# Altium PCB AI-EYE.PcbDoc
Units mil, origin at the board's own origin, x right, y up, seen from the top; angles counter-clockwise.
Board outline 2170 x 1780 mil, 2 copper layers (Top Layer, Bottom Layer); 71 components, 68 nets, 256 pads, 122 vias.
Unrouted connection lines stored in the file: 48.
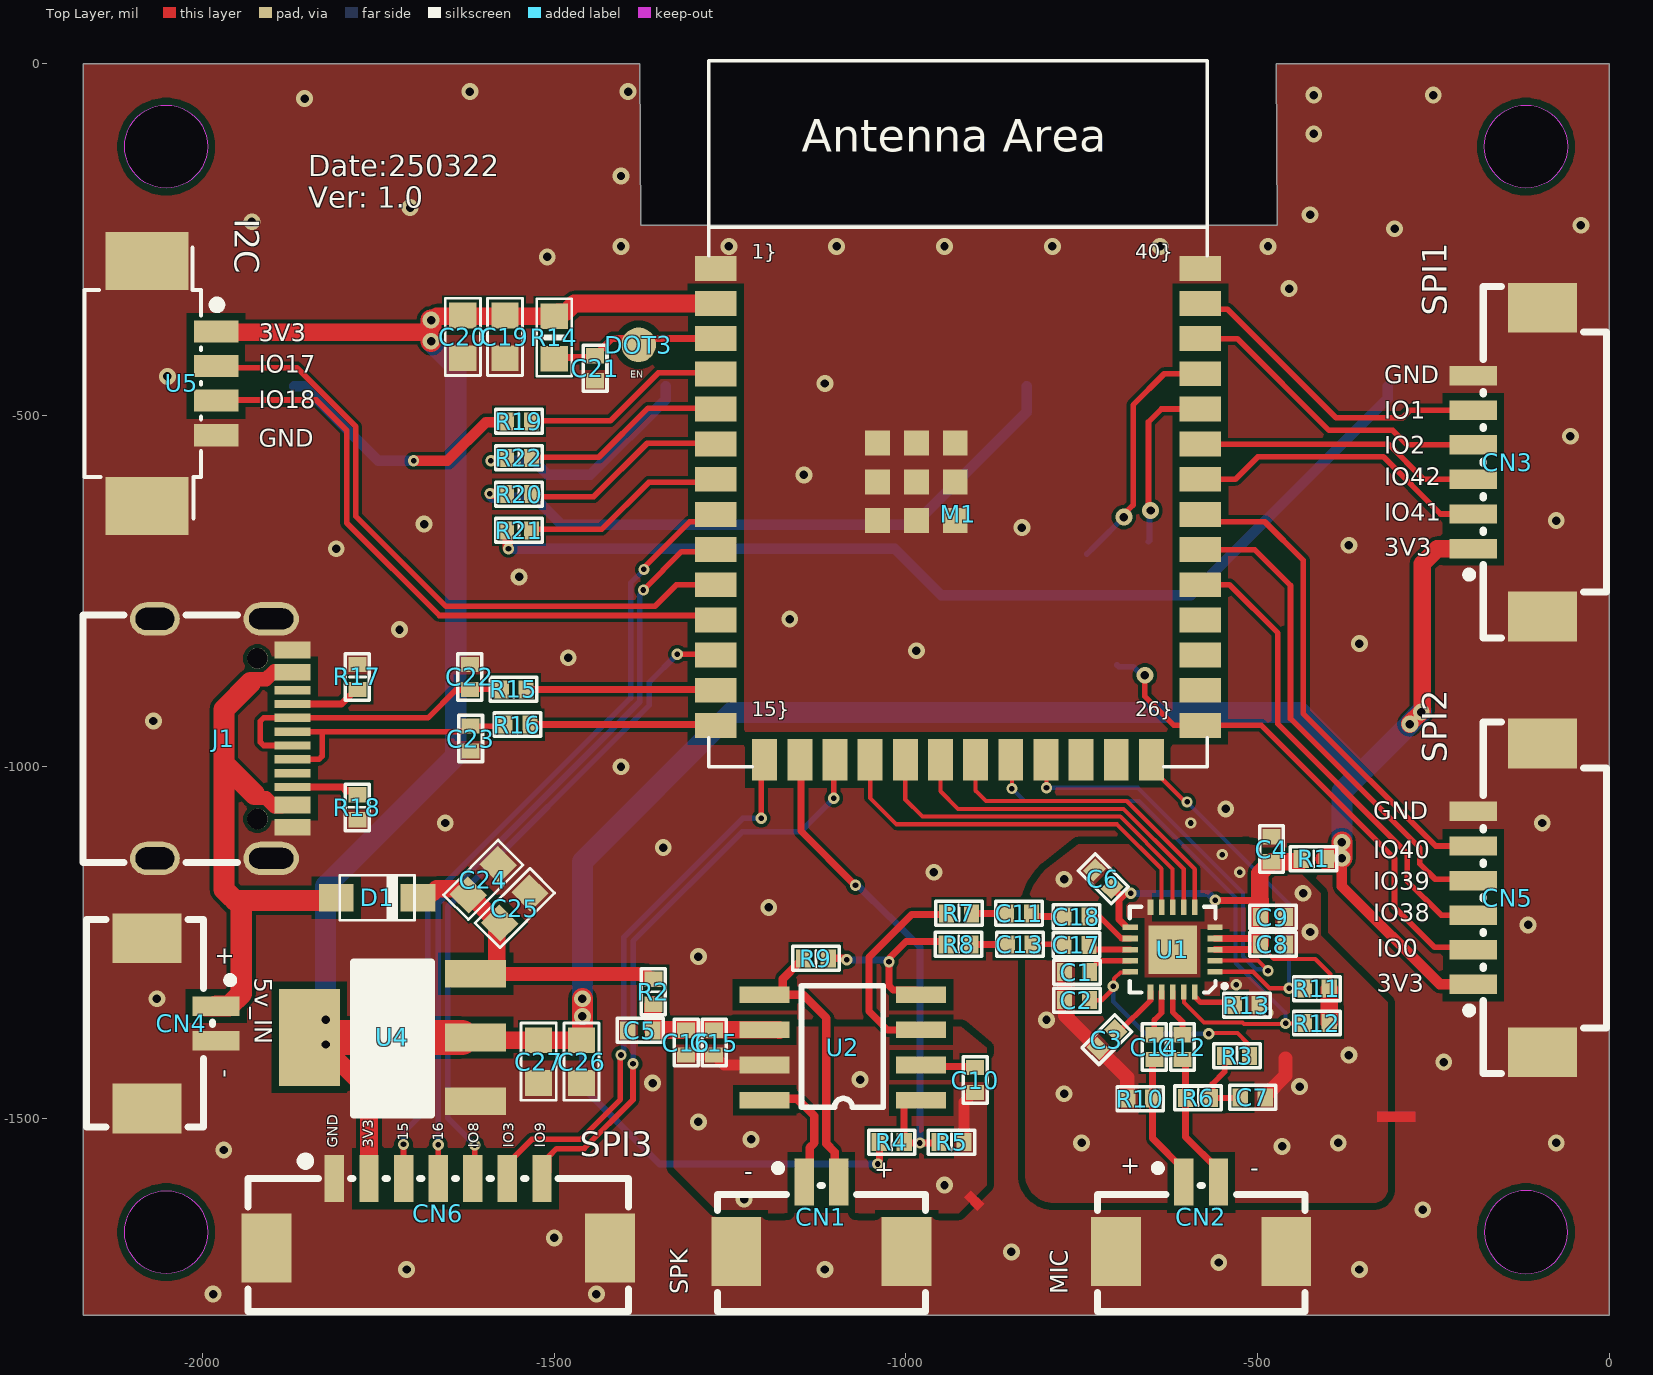
[diagram p0: Top Layer view]
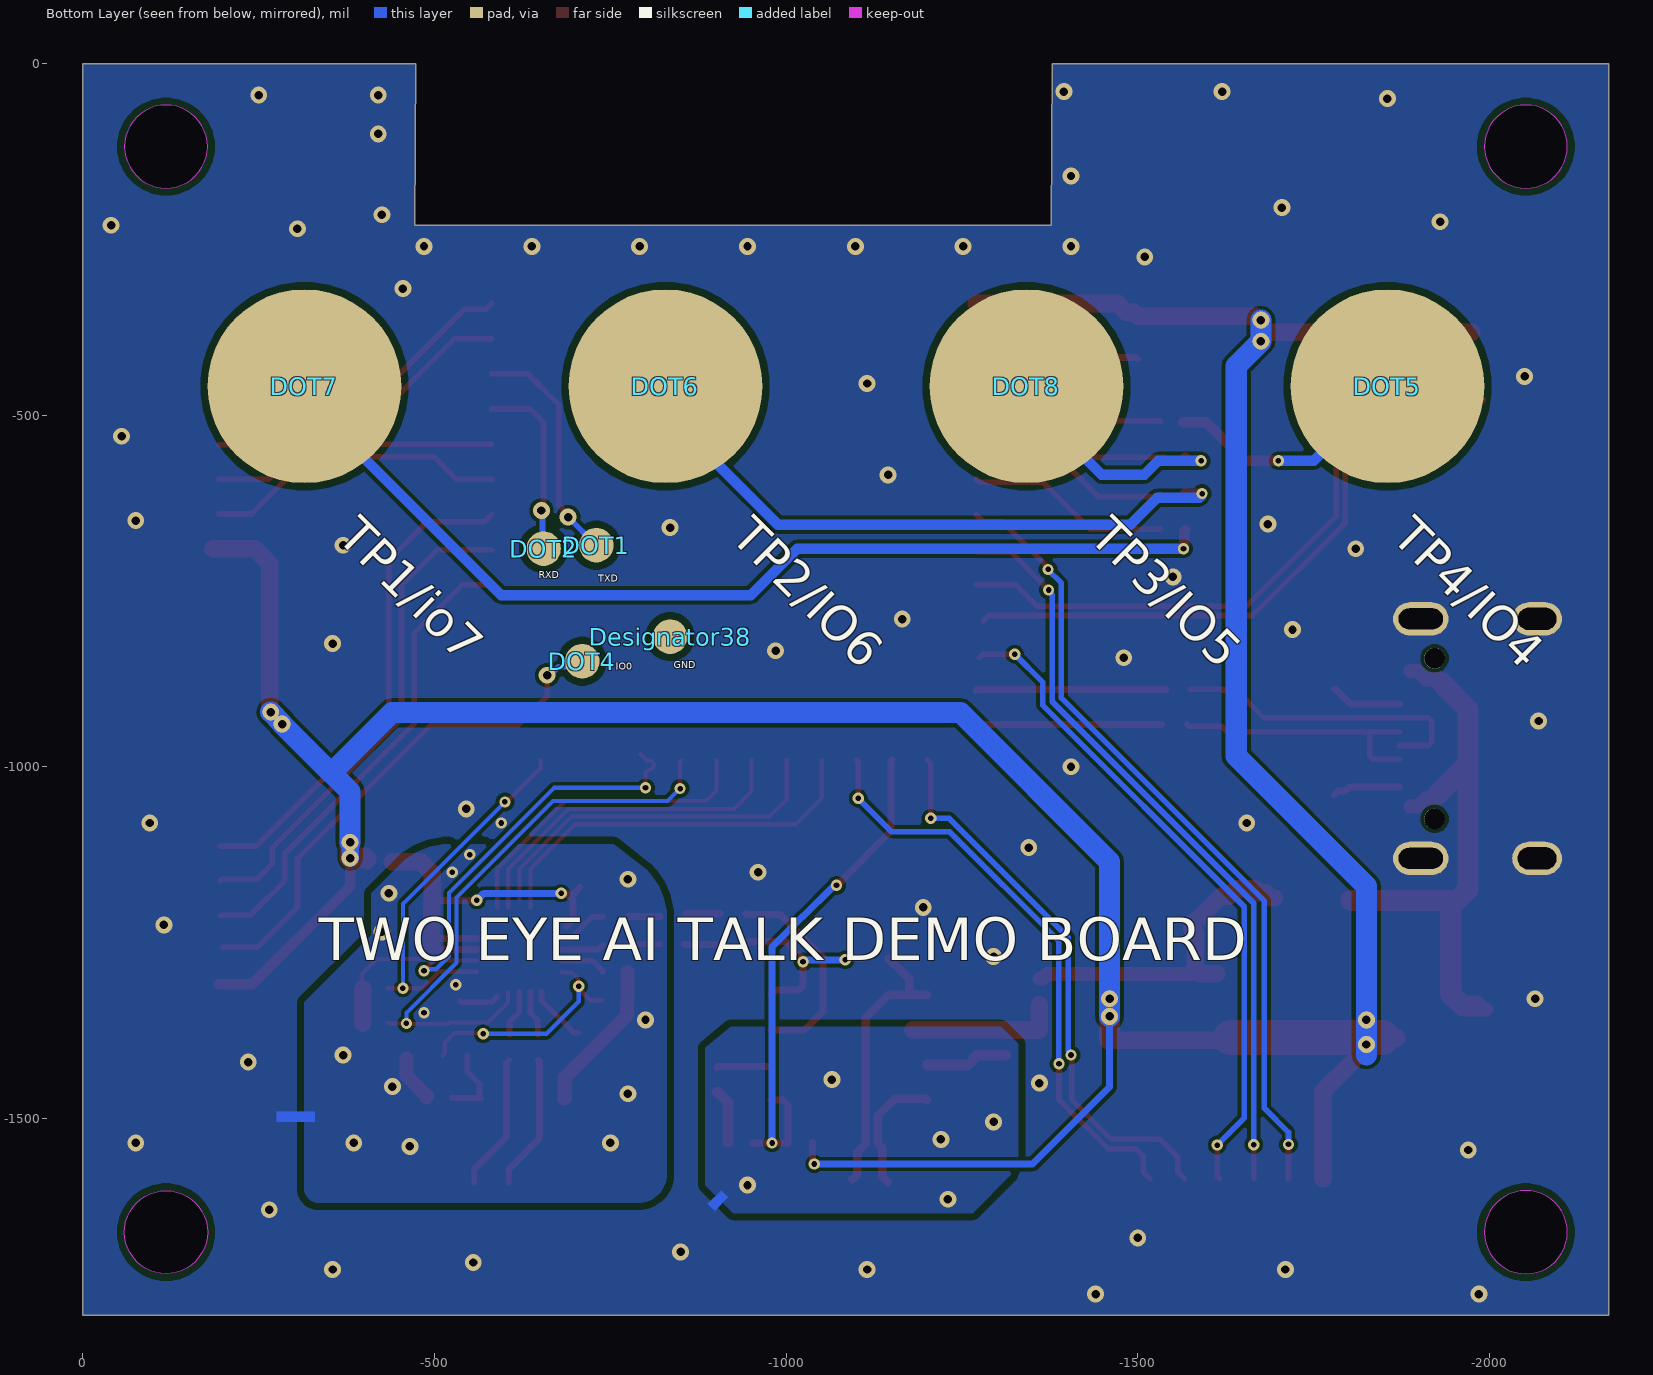
[diagram p1: Bottom Layer view, seen from below]
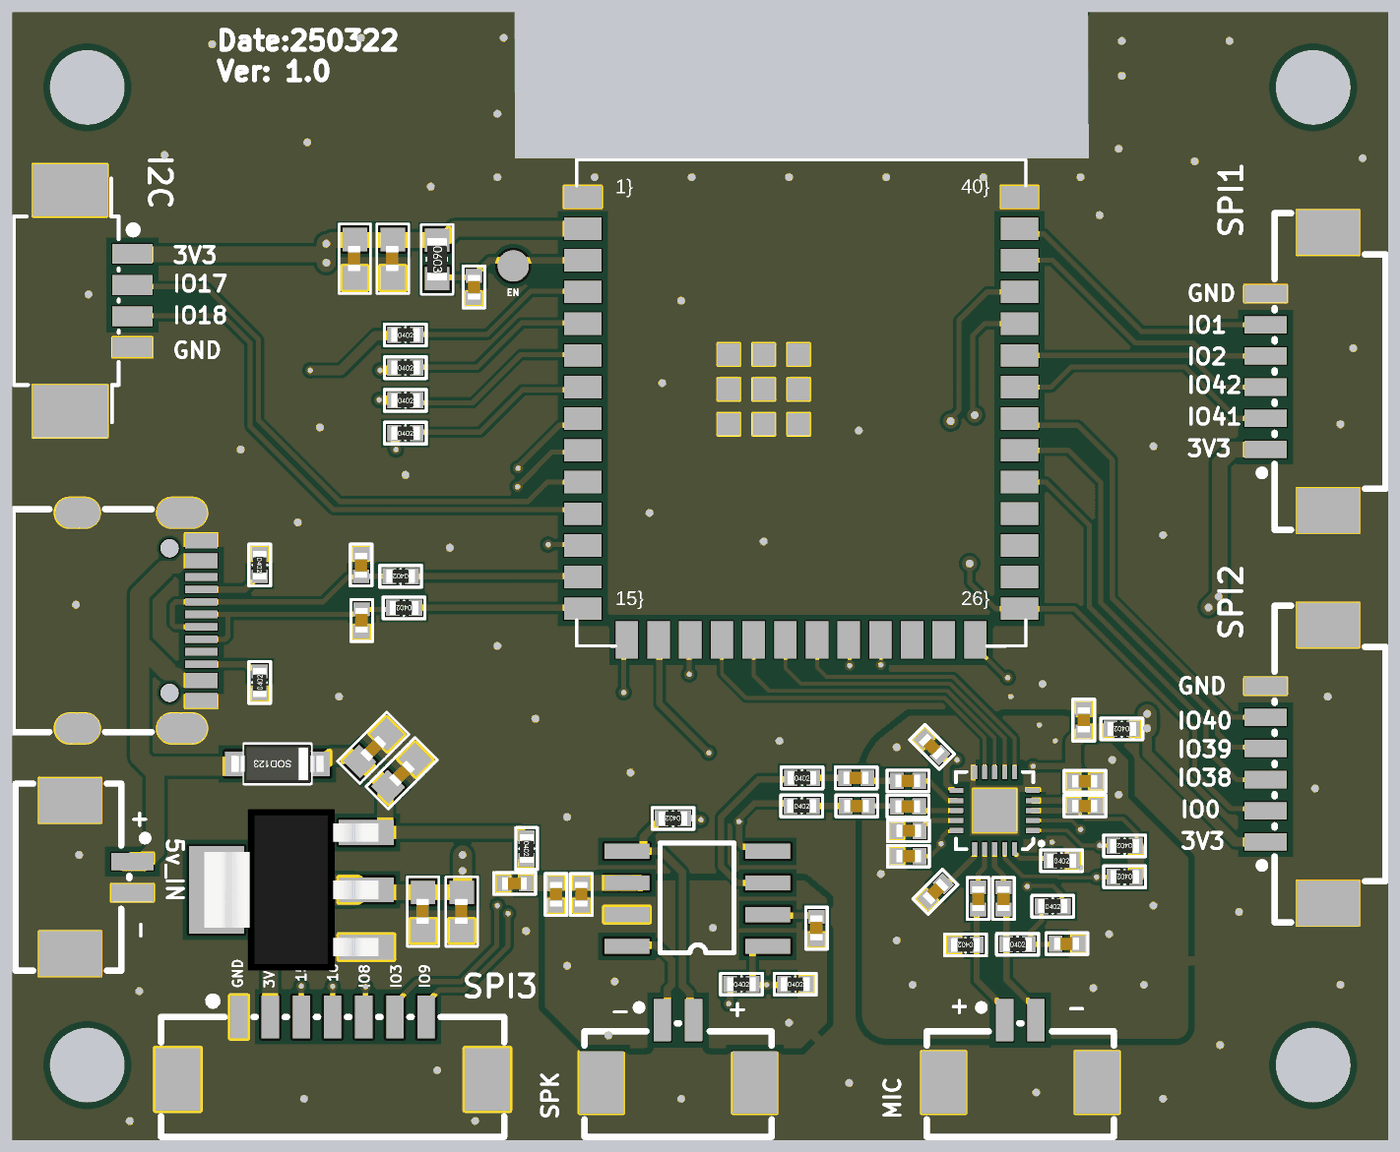
[diagram p2: 3D render of the assembled board from above, using the file's embedded part models]

## Layer stack, top to bottom
Top Solder: solder mask 0.4, Solder Resist, Dk 3.5
Top Layer: signal copper 1.4
Dielectric 1: dielectric 12.6, FR-4, Dk 4.8
Bottom Layer: signal copper 1.4
Bottom Solder: solder mask 0.4, Solder Resist, Dk 3.5

## Board outline
-2170,-1780 -2170,0 -1378.36,0 -1377.28,-230 -472.03,-230 -473.07,0 0,0 0,-1780
cut-out: -2051.89,-177.17 cw(c-2051.89,-118.11) -2110.94,-118.11 cw(c-2051.89,-118.11) -2051.89,-59.06 cw(c-2051.89,-118.11) -1992.83,-118.11 cw(c-2051.89,-118.11)
cut-out: -118.11,-177.17 cw(c-118.11,-118.11) -177.17,-118.11 cw(c-118.11,-118.11) -118.11,-59.06 cw(c-118.11,-118.11) -59.06,-118.11 cw(c-118.11,-118.11)
cut-out: -177.17,-1661.89 ccw(c-118.11,-1661.89) -118.11,-1720.94 ccw(c-118.11,-1661.89) -59.06,-1661.89 ccw(c-118.11,-1661.89) -118.11,-1602.83 ccw(c-118.11,-1661.89)
cut-out: -2051.89,-1720.94 cw(c-2051.89,-1661.89) -2110.94,-1661.89 cw(c-2051.89,-1661.89) -2051.89,-1602.83 cw(c-2051.89,-1661.89) -1992.83,-1661.89 cw(c-2051.89,-1661.89)

## Design rules (kind name [scope] priority, off if disabled: settings)
Clearance [All] p1: gap=5 ignorepadtopadclearanceinfootprint=FALSE except(10: SMDPad-Fill SMDPad-Poly SMDPad-Region Fill-Fill Fill-Poly Fill-Region Poly-Poly Poly-Region Region-Region)
DiffPairsRouting [All] p1: maxlimit=10 minlimit=5 mostfreqgap=5 toplayer_minwidth=4 toplayer_maxwidth=15 toplayer_prefwidth=6 bottomlayer_minwidth=4 bottomlayer_maxwidth=15 bottomlayer_prefwidth=6 maxuncoupledlength=500
PolygonConnect VIA [IsVia Or IsPad] p1: connectstyle=Direct reliefconductorwidth=10 reliefentries=4 polygonreliefangle="90 Angle" airgapwidth=10
PolygonConnect [All] p2: connectstyle=Relief reliefconductorwidth=10 reliefentries=4 polygonreliefangle="90 Angle" airgapwidth=10
RoutingVias [All] p1: holewidth=8 width=16 viastyle="Through Hole" minholewidth=5 minwidth=10 maxholewidth=28 maxwidth=50
ShortCircuit [InNet('AGND')] p1: allowed=TRUE
SolderMaskExpansion [All] p1: expansion=4 istentingtop=FALSE
Width 3v3 [All] p1: maxlimit=50 minlimit=3 preferedwidth=25 minimp=50.000000 maximp=50.000000 favimp=50.000000
Width [All] p2: maxlimit=50 minlimit=4 preferedwidth=5 minimp=50.000000 maximp=50.000000 favimp=50.000000
28 further rules are at their usual default settings.

## Classes and differential pairs
differential pair USB: +USB_P -USB_N

## Components (designator, comment, footprint, x,y, rotation, side; value= is the part's Value field where it differs from the comment)
C1 "1uF" 0402C -756.61,-1291.03 r180 top
C2 "1uF" 0402C -756.61,-1331.03 r180 top
C3 "1uF" 0402C -714.79,-1387.39 r225 top
C4 "100nF" 0402C -481,-1117.28 r270 top
C5 "100nF" 0402C -1377.68,-1375.96 r0 top
C6 "1uF" 0402C -720,-1160 r315 top
C7 "10uF" 0402C -506.61,-1471.03 r0 top
C8 "100nF" 0402C -478.04,-1253.66 r0 top
C9 "100nF" 0402C -478.01,-1214.75 r0 top
C10 "1uF" 0402C -902.49,-1445.52 r270 top
C11 "1uF" 0402C -838.96,-1209.42 r0 top
C12 "1uF" 0402C -605.61,-1398.75 r90 top
C13 "1uF" 0402C -837.9,-1253.62 r0 top
C14 "1uF" 0402C -645.61,-1398.75 r90 top
C15 "10uF" 0402C -1273.49,-1392.41 r270 top
C16 "1uF" 0402C -1313.49,-1392.41 r270 top
C17 "1uF" 0402C -757.32,-1254.18 r0 top
C18 "1uF" 0402C -757.32,-1214.18 r0 top
C19 "22uF" 0603C -1570,-390 r270 top
C20 "100nF" 0603C -1630,-390 r270 top
C21 "TBD/1uF" 0402C -1440.94,-433.32 r90 top
C22 "1uF" 0402C -1619,-872.28 r90 top
C23 "1uF" 0402C -1620,-960 r270 top
C24 "10uF" 0603C -1600,-1160 r45 top
C25 "100nF" 0603C -1555,-1200 r45 top
C26 "22uF" 0603C -1461.18,-1420.72 r270 top
C27 "100nF" 0603C -1522.18,-1420.72 r270 top
CN1 "MX1.25-WT2P" CONN-SMD_2P-P1.25-WT2P -1120,-1640 r0 top
CN2 "MX1.25-WT2P" CONN-SMD_2P-P1.25-WT2P -580,-1640 r0 top
CN3 "MX1.25-6PWB" CONN-SMD_6P-P1.25_XUNPU_WAFER-MX1.25-6PWB -143.88,-566.8 r90 top
CN4 "MX1.25-WT2P" CONN-SMD_2P-P1.25-WT2P -2030,-1365 r270 top
CN5 "MX1.25-6PWB" CONN-SMD_6P-P1.25_XUNPU_WAFER-MX1.25-6PWB -143.88,-1186.51 r90 top
CN6 "MX1.25-7PWT" CONN-SMD_7P-P1.25_MX1.25-7PWT -1665,-1635 r0 top
D1 "SS14" SOD123 -1751.86,-1186.17 r180 top
Designator38 "Comment" TP-1.524 -835,-815 r180 bottom
DOT1 "TP" TP-1.524 -730,-685 r90 bottom
DOT2 "TP" TP-1.524 -655,-690 r90 bottom
DOT3 "TP" TP-1.524 -1380,-400 r0 top
DOT4 "TP" TP-1.524 -710,-850 r90 bottom
DOT5 "TP4" TP-5 -1855.04,-458.99 r180 bottom
DOT6 "TP2" TP-5 -828.32,-458.99 r180 bottom
DOT7 "TP1" TP-5 -314.96,-458.99 r180 bottom
DOT8 "TP3" TP-5 -1341.68,-458.99 r180 bottom
J1 "Type-c-16p" USB-TYPE-C -1970,-960 r270 top
M1 "ESPS3-WROOM-32" ESPS3-WROOM-32 -925.75,-640.81 r0 top
R1 "0R" 0402R -420,-1130 r180 top
R2 "0R" 0402R -1360,-1320 r270 top
R3 "220" 0402R -528.9,-1412.03 r0 top
R4 "100K" 0402R -1020,-1535 r0 top
R5 "100K" 0402R -935,-1535 r0 top
R6 "1.2K" 0402R -584.33,-1472.03 r0 top
R7 "1K" 0402R -924.39,-1209.42 r0 top
R8 "1K" 0402R -924.91,-1253.62 r0 top
R9 "100K" 0402R -1127.92,-1271.38 r180 top
R10 "1.2K" 0402R -666.61,-1471.03 r180 top
R11 "10K" 0402R -415.54,-1314.66 r180 top
R12 "10K" 0402R -415.44,-1363.47 r180 top
R13 "10K" 0402R -515,-1340 r0 top
R14 "TBD/10K" 0603R -1500,-389.68 r270 top
R15 "0R" 0402R -1557.72,-889 r180 top
R16 "0R" 0402R -1552.28,-939 r180 top
R17 "5.1K" 0402R -1781,-872.28 r270 top
R18 "5.1K" 0402R -1779,-1057.72 r90 top
R19 "1K" 0402R -1550,-510 r0 top
R20 "1K" 0402R -1550,-613.33 r0 top
R21 "1K" 0402R -1550,-665 r0 top
R22 "1K" 0402R -1550,-561.67 r0 top
U1 "ES8311" QFN-20-3X3 -620.59,-1260 r90 top
U2 "8002D" SOP8-1.27*5.4 -978.34,-1474.18 r180 top
U4 "AMS1117-33" SOT-223 -1730,-1385 r270 top
U5 "ZX-MX1.25-4PWT" CONN-SMD_4P-P1.25-MX1.25-4P-WT -2030,-455 r270 top

## Footprints (in the part's own frame and the unit in brackets; to place one, negate y for a bottom-side part, rotate by r counter-clockwise, add the part's x,y. Pads: shape width x height; smd on the part's side, far side on the other; paste and mask are expansions set on the pad)
0402C [mm]
  rect 0.55x0.65 smd mask+0.051: 1(-0.45,0.025) 2(0.45,0.025)
  silkscreen extent -0.84,-0.41 0.84,0.46, body extent -0.51,-0.23 0.49,0.27, height 0.6
0402R [mm]
  rect 0.55x0.65 smd mask+0.051: 1(-0.45,0.025) 2(0.45,0.025)
  silkscreen extent -0.84,-0.41 0.84,0.46, body extent -0.57,-0.25 0.58,0.3, height 0.41
0603C [mm]
  rect 0.93x0.98 smd: 1(-0.803,0) 2(0.737,0)
  silkscreen extent -1.43,-0.64 1.36,0.64, body extent -0.54,-0.27 0.46,0.23, height 0.6
0603R [mm]
  rect 0.93x0.98 smd: 1(-0.77,0) 2(0.77,0)
  silkscreen extent -1.4,-0.64 1.4,0.64, body extent -0.85,-0.4 0.85,0.4, height 0.56
CONN-SMD_2P-P1.25-WT2P [mm]
  rect 0.7x1.7 smd paste+0 mask+0.05: 1(-0.625,1.25) 2(0.625,1.25)
  rect 1.8x2.5 smd paste+0 mask+0.05: 3(3.075,-1.25) 4(-3.075,-1.25)
  silkscreen extent -3.75,-3.43 3.75,1.88
CONN-SMD_4P-P1.25-MX1.25-4P-WT [mm]
  rect 0.8x1.6 smd paste+0 mask+0.05: 1(-1.88,1.25) 2(-0.63,1.25) 3(0.62,1.25) 4(1.87,1.25)
  rect 2.1x3 smd paste+0 mask+0.05: 5(4.43,-1.25) 6(-4.43,-1.25)
  silkscreen extent -4.9,-3.5 4.87,1.43
CONN-SMD_6P-P1.25_XUNPU_WAFER-MX1.25-6PWB [mm]
  rect 0.7x1.7 smd paste+0 mask+0.05: 1(-3.125,1.25) 2(-1.875,1.25) 3(-0.625,1.25) 4(0.625,1.25) 5(1.875,1.25) 6(3.125,1.25)
  rect 1.8x2.5 smd paste+0 mask+0.05: 7(5.575,-1.25) 8(-5.575,-1.25)
  silkscreen extent -6.35,-3.56 6.35,1.52
CONN-SMD_7P-P1.25_MX1.25-7PWT [mm]
  rect 0.7x1.7 smd: 1(-3.75,1.25) 2(-2.5,1.25) 3(-1.25,1.25) 4(0,1.25) 5(1.25,1.25) 6(2.5,1.25) 7(3.75,1.25)
  rect 1.8x2.5 smd: 8(6.2,-1.25) 9(-6.2,-1.25)
  silkscreen extent -6.88,-3.56 6.87,2.19
ESPS3-WROOM-32 [mm]
  rect 1.5x0.9 smd mask+0.051: 1(-8.751,8.879) 2(-8.751,7.609) 3(-8.751,6.339) 4(-8.751,5.069) 5(-8.751,3.799) 6(-8.751,2.529) 7(-8.751,1.259) 8(-8.751,-0.011) 9(-8.751,-1.281) 10(-8.751,-2.551) 11(-8.751,-3.821) 12(-8.751,-5.091) 13(-8.751,-6.361) 14(-8.751,-7.631) 27(8.751,-7.63) 28(8.751,-6.36) 29(8.751,-5.09) 30(8.751,-3.82) 31(8.751,-2.55) 32(8.751,-1.28) 33(8.751,-0.01) 34(8.751,1.26) 35(8.751,2.53) 36(8.751,3.8) 37(8.751,5.07) 38(8.751,6.34) 39(8.751,7.61) 40(8.751,8.88)
  rect 0.9x1.5 smd mask+0.051: 15(-6.985,-8.88) 16(-5.715,-8.88) 17(-4.445,-8.88) 18(-3.175,-8.88) 19(-1.905,-8.88) 20(-0.635,-8.88) 21(0.635,-8.88) 22(1.905,-8.88) 23(3.175,-8.88) 24(4.445,-8.88) 25(5.715,-8.88) 26(6.985,-8.88)
  rect 0.9x0.9 smd mask+0.051: 41(-2.902,-0.233) 41(-2.902,1.167) 41(-2.902,2.567) 41(-1.502,-0.233) 41(-1.502,1.167) 41(-1.502,2.567) 41(-0.102,2.567) 41(-0.102,-0.233) 41(-0.102,1.167)
  silkscreen extent -9,-9.13 9,16.37
QFN-20-3X3 [mm]
  rect 0.2x0.55 smd mask+0.051: 1(-0.8,-1.53) 2(-0.4,-1.53) 3(0,-1.53) 4(0.4,-1.53) 5(0.8,-1.53) 11(0.8,1.53) 12(0.4,1.53) 13(0,1.53) 14(-0.4,1.53) 15(-0.8,1.53)
  rect 0.55x0.2 smd mask+0.051: 6(1.53,-0.8) 7(1.53,-0.4) 8(1.53,0) 9(1.53,0.4) 10(1.53,0.8) 16(-1.53,0.8) 17(-1.53,0.4) 18(-1.53,0) 19(-1.53,-0.4) 20(-1.53,-0.8)
  rect 1.75x1.75 smd mask+0.051: 21(0,0)
  silkscreen extent -1.55,-1.95 1.55,1.55, body extent -1.55,-1.55 1.55,1.55, height 0.8
SOD123 [mm]
  rect 1.25x1 smd: 1(1.475,0) 2(-1.475,0)
  silkscreen extent -1.35,-0.84 1.35,0.86, body extent -1.85,-0.77 1.85,0.78, height 1.35
SOP8-1.27*5.4 [mm]
  rect 1.8x0.6 smd: 1(0,0) 2(0,-1.27) 3(0,-2.54) 4(0,-3.81) 5(5.65,-3.81) 6(5.65,-2.54) 7(5.65,-1.27) 8(5.65,0)
  silkscreen extent 1.36,-4.14 4.32,0.25
SOT-223 [mm]
  rect 1x2.2 smd: 1(2.3,3) 2(0,3) 3(-2.3,3)
  rect 3.5x2.2 smd: 4(0,-3)
  silkscreen extent -2.72,-1.4 2.79,1.4, body extent -3.24,-3.49 3.24,3.49, height 1.64
TP-1.524 [mm]
  round 1.25 smd: 1(0,0)
TP-5 [mm]
  round 7 smd: 1(0,0)
USB-TYPE-C [mm]
  oval 1.2x2 hole 0.75 slot 1.6 at 90 deg mask+0.051: 0(-4.325,1.716) 0(4.325,1.716)
  oval 1.2x1.8 hole 0.8 slot 1.4 at 90 deg mask+0.051: 0(-4.325,-2.484) 0(4.325,-2.484)
  rect 0.3x1.3 smd mask+0.051: A1(-3.35,2.484) A4(-2.55,2.484) A5(-1.25,2.484) A6(-0.25,2.484) A7(0.25,2.484) A8(1.25,2.484) A9(2.55,2.484) A12(3.35,2.484) B1(3.05,2.484) B4(2.25,2.484) B5(1.75,2.484) B6(0.75,2.484) B7(-0.75,2.484) B8(-1.75,2.484) B9(-2.25,2.484) B12(-3.05,2.484)
  round 0.75 hole 0.75 unplated mask+0.051: ""(-2.9,1.216) ""(2.9,1.216)
  silkscreen extent -4.47,-5.08 4.47,0.5

## Part data
C1 C2 C3 C4 C5 C6 C7 C8 C9 C10 C11 C12 C13 C14 C15 C16 C17 C18 C19 C20 C21 C22 C23 C24 C25 C26 C27: library part CAP-SMD
CN1 CN2 CN4: library part CONN-MX1.25-2P, Current Rating (Max)=2A, JLCPCB Part Class="Extended Part", Manufacturer=Megastar(兆星), Operating Temperature Range=-25℃~+85℃, Add into BOM=yes, Contact Material=黄铜, Contact Plating=锡, Convert to PCB=yes, Manufacturer Part=MX1.25-WT2P, Mounting Style=卧贴, Number of Pins=2P, Number of PINs Per Row=2, Number of Rows=1, Pins Structure=1x2P, Pitch=2mm, Reference Series=MX, Row Spacing=-, Supplier Footprint=SMD,P=2mm,卧贴, Supplier Part=C7429689
CN3 CN5: library part CONN-MX1.25-6PWB, Color=米色, Current Rating=1A, Flame Retardant Rating=-, JLCPCB Part Class="Extended Part", LCSC Part Name="1x6P 间距:1.25mm 卧贴 系列:PicoBlade(MX 1.25)", Manufacturer=XUNPU(讯普), Manufacturer Part=WAFER-MX1.25-6PWB, Operating Temperature=-25℃~+85℃, Voltage Rating=125V, Add into BOM=yes, Contact Material=黄铜, Contact Plating=-, Convert to PCB=yes, Datasheet=https://atta.szlcsc.com/upload/public/pdf/source/20220527/5ACBB683E384B6AD06743F272F933620.pdf, Device=WAFER-MX1.25-6PWB, Mounting Type=卧贴, Number of Pins=6P, Number of PINs Per Row=6, Number of Rows=1, Pins Structure=1x6P, Pitch=1.25mm, Plastic Material=LCP, Reference Series="PicoBlade(MX 1.25)", Row Spacing=-, Supplementary Features=辅助焊脚, Supplier=LCSC, Supplier Footprint=SMD,P=1.25mm,卧贴, Supplier Part=C3029363, Symbol=WAFER-MX1.25-6PWB, X-Length of Bottom Edge on Board (Spacing Line)=12.5mm, Y-Width of Bottom Edge on Board=5.25mm, Z-Height of the Board=3.6mm
CN6: library part CONN-MX1.25-7PWT, Color=米色, Current Rating=1A, Flame Retardant Rating=-, JLCPCB Part Class="Extended Part", LCSC Part Name="1x7P 间距:1.25mm 卧贴 系列:PicoBlade(MX 1.25)", Manufacturer=Bossie(博锡), Manufacturer Part=BX-MX1.25-7PWT, Operating Temperature=-25℃~+85℃, Voltage Rating=125V, Add into BOM=yes, Contact Material=黄铜, Contact Plating=锡, Convert to PCB=yes, Datasheet=https://atta.szlcsc.com/upload/public/pdf/source/20231201/C3F3F956D9D5AD117E6D1BC59464241C.pdf, Device=BX-MX1.25-7PWT, Mounting Type=卧贴, Number of Pins=7P, Number of PINs Per Row=7, Number of Rows=1, Pins Structure=1x7P, Pitch=1.25mm, Plastic Material=LCP, Reference Series="PicoBlade(MX 1.25)", Row Spacing=-, Supplementary Features=辅助焊脚, Supplier=LCSC, Supplier Footprint=SMD,P=1.25mm,卧贴, Supplier Part=C19272477, Symbol=BX-MX1.25-7PWT, X-Length of Bottom Edge on Board (Spacing Line)=13.75mm, Y-Width of Bottom Edge on Board=5.25mm, Z-Height of the Board=3.6mm
D1: library part D, "Schottky diode"
DOT5 DOT6 DOT7 DOT8: library part TP, PCB Footprint=TP1.524
J1: library part USB-TYPE-C
R1 R2 R3 R4 R5 R6 R7 R8 R9 R10 R11 R12 R13 R14 R15 R16 R17 R18 R19 R20 R21 R22: library part Res, "Resistor"
U5: library part CONN-MX1.25-4PWT, Colour=米色, Current Rating (Max)=-, JLCPCB Part Class="Extended Part", LCSC Part Name="1x4P 间距:1.25mm 卧贴 系列:PicoBlade(MX 1.25) 配套胶壳型号：ZX-MX1.25-4PJK 配套端子型号：ZX-MX1.25-DZ 配套杜邦线型号：ZX-MX1.25-4PBXC", Manufacturer=Megastar(兆星), Add into BOM=yes, Contact Material=黄铜, Contact Plating=锡, Convert to PCB=yes, Datasheet=https://atta.szlcsc.com/upload/public/pdf/source/20230619/568E7DE8E71AB8D5E62B450F32774D0B.pdf, Device=ZX-MX1.25-4PWT, Flame Retardant Rating=-, Manufacturer Part=ZX-MX1.25-4PWT, Mounting Style=卧贴, Number of Pins=4P, Number of PINs Per Row=4, Number of Rows=1, Operating Temperature Range=-, Pins Structure=1x4P, Pitch=1.25mm, Plastic Material=-, Rated Voltage (Max)=-, Reference Series="PicoBlade(MX 1.25)", Row Spacing=-, Supplementary Features=辅助焊脚, Supplier=LCSC, Supplier Footprint=SMD,P=1.25mm,卧贴, Supplier Part=C7430470, Symbol=ZX-MX1.25-4PWT, X-Length of Bottom Edge on Board (Spacing Line)=10mm, Y-Width of Bottom Edge on Board=5.25mm, Z-Height of the Board=3.6mm
DOT1 DOT2 DOT3 DOT4: PCB Footprint=TP1.524

## Via types
v1: diameter 24/24 (per signal layer), hole 12, Top Layer to Bottom Layer, tented both sides, 88 vias
v2: diameter 16/16 (per signal layer), hole 8, Top Layer to Bottom Layer, tented both sides, 24 vias
v3: diameter 16, hole 8, Top Layer to Bottom Layer, tented both sides, 10 vias

## Nets (pads, with @x,y where several pads share a name; then routed paths per layer and width w, separated by ;. In a path a pad name is that pad's centre, name@x,y a point inside that pad or via, vN(x,y) a via of type N, cw(c..) or ccw(c..) an arc to the next point about the centre after c; other vN are vias at no path point)
ADCVREF: C2.1 R3.2 U1.15 | length 339.5
  Top Layer w6: C2.1 -721.36,-1332.03 -705,-1315.68 v2(-705,-1312.23) -703.78,-1311.01 -703.78,-1301.41 -694.81,-1292.44 -681.76,-1292.44 U1.15 ; v2(-569.13,-1379.75) -568.18,-1378.8 -528.5,-1378.8 -514.55,-1392.75 -514.55,-1407.66 R3.2
  Bottom Layer w6: v2(-705,-1312.23) -705,-1333.93 -659.19,-1379.75 v2(-569.13,-1379.75)
AGND: C1.2 C2.2 C3.2 C6.1 C7.2 C8.2 C9.2 R10.2 R13.2 U1.5 U1.10 U1.21 | length 284.3
  Top Layer w20: C1.2 C2.2 -773.5,-1332.86 -773.5,-1353.73 C3.2 -685.16,-1442.08 -685.16,-1471.2 R10.2 ; C7.2 -488.9,-1468.06 -460,-1439.16 -460,-1415
  other v1: -465,-1540 -750,-1535 -385,-1535 -775,-1465 -440,-1455 -370,-1410 -800,-1360 -425,-1235 -435,-1180 -775,-1160
  other v2: -485,-1350 -530,-1310 -525,-1150 -550,-1125
ES_VDD33: C4.2 C6.2 C8.1 C9.1 R1.2 R11.1 R12.1 U1.3 U1.4 U1.11 | length 744.4
  Top Layer w6: C8.1@-489.93,-1258.49 -489.93,-1260.46 -476.93,-1273.46 -417.74,-1273.46 -396.46,-1294.73 -396.46,-1314.29 R11.1
  Top Layer w10: C6.2@-706.52,-1171.82 -692.96,-1185.38 ; U1.11@-686.65,-1227.44 -696.96,-1217.13 -696.96,-1189.38 -692.96,-1185.38 ; v2(-680,-1180) -687.57,-1180 -692.96,-1185.38 ; U1.3 -501.58,-1260 C8.1@-495.75,-1254.17 ; U1.4 C8.1@-502.2,-1244.25 ; v2(-560,-1190) -500,-1190 ; C8.1 C8.1@-489.93,-1258.49
  Top Layer w25: -496.53,-1190 -496.53,-1151.53 C4.2 R1.2@-440,-1135 ; C8.1@-495.73,-1252.64 -495.73,-1190 ; R11.1 R11.1 -397.77,-1364.42 R12.1
  Bottom Layer w10: v2(-680,-1180) -570,-1180 v2(-560,-1190)
GND: C4.1 C5.1 C19.2 C20.2 C21.1 C22.2 C23.2 C24.2 C25.2 C26.2 C27.2 CN1.3 CN1.4 CN2.3 CN2.4 CN3.6 CN3.7 CN3.8 CN4.2 CN4.3 CN4.4 CN5.6 CN5.7 CN5.8 CN6.1 CN6.8 CN6.9 J1.0 J1.A1 J1.A12 J1.B1 J1.B12 M1.1 M1.40 M1.41 R17.1 R18.1 U4.1 U5.4 U5.5 U5.6
  other v1: -1985,-1750 -1440,-1750 -1710,-1715 -1115,-1715 -355,-1715 -555,-1705 -850,-1690 -1500,-1670 -265,-1630 -1970,-1545 -75,-1535 -1360,-1450 -235,-1420 -2065,-1330 -1295,-1270 -115,-1225 -1195,-1200 -960,-1150 -1345,-1115 -1655,-1080 -95,-1080 -545,-1060 -1405,-1000 -2070,-935 -1480,-845 -985,-835 -355,-825 -1720,-805 -1165,-790 -1550,-730 -1810,-690 -370,-685 -835,-660 -1685,-655 -75,-650 -1145,-585 -55,-530 -1115,-455 -2050,-445 -455,-320 -1510,-275 -1405,-260 -1251.67,-260 -1098.33,-260 -945,-260 -791.67,-260 -638.33,-260 -485,-260 -305,-235 -40,-230 -1930,-225 -425,-215 -1705,-205 -1405,-160 -420,-100 -1855,-50 -420,-45 -250,-45 -1620,-40 -1395,-40
  other v2: -595,-1080
IN+: C11.2 C18.1 | length 46.2
  Top Layer w10: C11.2@-821.25,-1213.18 C18.1
IN-: C13.2 C17.1 | length 53.3
  Top Layer w8: C13.2 -775.6,-1252.62 C17.1@-775.04,-1252.62 ; C17.1 C17.1@-775.04,-1252.62 ; C17.1@-775.04,-1252.62 -773.63,-1252.62 -775.04,-1251.21 C17.1@-775.04,-1252.62
  Top Layer w10: C17.1@-777.01,-1251.21 -775.6,-1252.62 C17.1
IO0: CN5.2 DOT4.1 M1.27 | length 725.8
  Top Layer w8: v1(-660,-870) -660,-900 -618.78,-941.22 M1.27 -494.34,-941.22 -305.11,-1130.45 -305.11,-1199.89 -248.22,-1256.78 CN5.2@-198.92,-1256.78
  Bottom Layer w8: DOT4.1@-700,-855 -697.11,-857.89 -676.44,-857.89 -664.33,-870 v1(-660,-870)
IO1: CN3.5 M1.39 | length 459.9
  Top Layer w8: M1.39 -572.92,-349.54 -542.57,-349.54 -388.37,-503.75 -293.34,-503.75 -282.58,-492.99 CN3.5
IO2: CN3.4 M1.38 | length 450.7
  Top Layer w8: M1.38 -528.78,-391.22 -398.25,-521.75 -307.64,-521.75 -287.19,-542.2 CN3.4
IO3: CN6.6 M1.15 | length 802.7
  Top Layer w8: CN6.6 -1556.8,-1576.01 -1556.8,-1554.93 -1531.87,-1530 -1462.79,-1530 -1406,-1473.21 -1406,-1411 v3(-1405,-1410) ; v3(-1205.66,-1073.35) -1205.66,-995.32 M1.15
  Bottom Layer w8: v3(-1405,-1410) -1405,-1407.84 -1400.87,-1403.71 -1400.87,-1242.43 -1231.79,-1073.35 v3(-1205.66,-1073.35)
IO4: M1.4 R19.2 | length 280.9
  Top Layer w8: R19.2 -1531.35,-508.06 -1420.19,-508.06 -1352.13,-440 M1.4@-1280,-440
IO5: M1.5 R22.2 | length 287.9
  Top Layer w8: R22.2@-1538.89,-560 -1436.62,-560 -1366.62,-490 M1.5@-1280,-490
IO6: M1.6 R20.2 | length 280.3
  Top Layer w8: R20.2 -1528.62,-615.99 -1443.77,-615.99 -1367.78,-540 M1.6@-1285,-540
IO7: M1.7 R21.2 | length 292.1
  Top Layer w8: R21.2@-1532.81,-662.56 -1432.55,-662.56 -1365.67,-595.68 -1274.69,-595.68 M1.7
IO8: CN6.5 M1.12 | length 950.1
  Top Layer w8: CN6.5 -1613.01,-1583 v3(-1613.01,-1538.04) ; v3(-1325,-840) -1280,-840 M1.12@-1275,-845
  Bottom Layer w8: v3(-1613.01,-1538.04) -1651.45,-1499.6 -1651.45,-1199.1 -1364.76,-912.41 -1364.76,-879.76 v3(-1325,-840)
IO9: CN6.7 M1.17 | length 839.2
  Top Layer w8: CN6.7 -1507.58,-1576.01 -1507.58,-1554.01 -1496.57,-1543 -1457.41,-1543 -1388,-1473.59 v3(-1388,-1422.51) ; v3(-1102.4,-1044.81) -1102.4,-992.06 M1.17
  Bottom Layer w8: v3(-1388,-1422.51) -1387.87,-1422.38 -1387.87,-1247.81 -1232.48,-1092.42 -1150.01,-1092.42 v3(-1102.4,-1044.81)
IO10: M1.18 U1.9 | length 564.7
  Top Layer w6: M1.18 -1050.75,-1044.29 -1013.1,-1081.93 -699.51,-1081.93 -636.33,-1145.11 U1.9
IO11: M1.19 U1.8 | length 520.9
  Top Layer w6: M1.19 -1000.75,-1046.67 -976.48,-1070.93 -694.95,-1070.93 -620.59,-1145.3 -620.59,-1188.93
IO12: M1.20 U1.7 | length 490.5
  Top Layer w6: M1.20 -950.75,-1034.93 -925.75,-1059.93 -690.4,-1059.93 -604.84,-1145.49 U1.7
IO13: M1.21 U1.6 | length 455.6
  Top Layer w6: M1.21 -900.75,-1034.06 -885.87,-1048.93 -685.84,-1048.93 -589.09,-1145.68 U1.6
IO14: M1.22 R12.2 U1.19 | length 832.1
  Top Layer w6: M1.22 -849.18,-991.97 v2(-849.18,-1031.14) ; U1.19 -604.42,-1320.66 -604.42,-1335.29 -575.96,-1363.75 -521.42,-1363.75 -519.16,-1366 -461,-1366 v2(-460,-1365) -434.41,-1365 R12.2@-433.15,-1363.75
  Bottom Layer w6: v2(-849.18,-1031.14) -831.39,-1048.93 -668.29,-1048.93 -531.33,-1185.89 -531.33,-1278.67 -460,-1350 v2(-460,-1365)
IO15: CN6.3 M1.8 | length 1144.1
  Top Layer w8: v3(-1714.36,-1537.09) -1714.36,-1585.63 CN6.3 ; v3(-1372.44,-719.4) -1370.91,-717.87 -1370.91,-715.33 -1307.11,-651.53 -1280.55,-651.53 M1.8
  Bottom Layer w8: v3(-1714.36,-1537.09) -1714.36,-1520 -1680,-1485.64 -1680,-1190.88 -1391.31,-902.19 -1391.31,-738.89 -1372.44,-720.02 v3(-1372.44,-719.4)
IO16: CN6.4 M1.9 | length 1084.9
  Top Layer w8: CN6.4 -1664.95,-1585.74 v3(-1664.95,-1537.41) ; v3(-1373.2,-748.78) -1344.71,-720.29 -1344.71,-719.78 -1319,-694.07 -1273.08,-694.07 M1.9
  Bottom Layer w8: v3(-1664.95,-1537.41) -1664.95,-1194.22 -1378.31,-907.58 -1378.31,-756.05 -1373.2,-750.94 v3(-1373.2,-748.78)
IO17: M1.10 U5.2 | length 922.7
  Top Layer w8: U5.2@-1964.99,-432.62 -1865.93,-432.62 -1782,-516.55 -1782,-643.97 -1653.97,-772 -1357,-772 -1326.25,-741.25 M1.10
IO18: M1.11 U5.3 | length 918.4
  Top Layer w8: U5.3@-1991.06,-478.58 -1838.35,-478.58 -1795,-521.93 -1795,-653.38 -1663.38,-785 -1288.33,-785 M1.11@-1280,-793.33
IO21: M1.23 U1.2 | length 622.9
  Top Layer w6: v2(-800,-1030) -800,-1007.95 -809.2,-1002.13 -811.79,-999.55 -811.79,-994.58 -808.28,-991.06 -801.4,-991.06 M1.23@-792.45,-982.11 ; U1.2 -499.03,-1275.75 -485,-1289.78 v2(-485,-1290)
  Bottom Layer w6: v2(-800,-1030) -670,-1030 -520.33,-1179.67 -520.33,-1269.67 -501.91,-1288.09 -486.91,-1288.09 v2(-485,-1290)
IO38: CN5.3 M1.31 | length 679.4
  Top Layer w8: M1.31 -539.71,-741.22 -471,-809.94 -471,-939.1 -287.11,-1122.99 -287.11,-1162.57 -238.56,-1211.12 CN5.3@-195.37,-1211.12
IO39: CN5.4 M1.32 | length 705
  Top Layer w8: M1.32 -504.03,-691.22 -453,-742.25 -453,-931.65 -268.98,-1115.67 -268.98,-1138.2 -247.1,-1160.08 -197.19,-1160.08 CN5.4@-195.37,-1161.91
IO40: CN5.5 M1.33 | length 708.8
  Top Layer w8: M1.33 -570.84,-651.63 -489.61,-651.63 -435,-706.24 -435,-924.19 -246.5,-1112.7 CN5.5@-195.37,-1112.7
IO41: CN3.2 M1.34 | length 435.1
  Top Layer w8: M1.34 -531.22,-591.22 -499.3,-559.3 -321,-559.3 -239.67,-640.63 CN3.2
IO42: CN3.3 M1.35 | length 408.8
  Top Layer w8: M1.35@-581.17,-541.3 -313.54,-541.3 -263.44,-591.4 CN3.3
IO45: M1.26 R11.2 U1.1 | length 544.5
  Top Layer w6: M1.26 -650.75,-1002.22 -604.88,-1048.09 -601.91,-1048.09 v2(-600,-1050) ; U1.1 -506.13,-1291.5 -482.63,-1315 -433.91,-1315 R11.2
  Bottom Layer w6: v2(-600,-1050) -455,-1195 v2(-455,-1315)
IO46: M1.16 R4.2 R5.1 U2.1 | length 749.7
  Top Layer w10: M1.16 -1149.14,-992.01 -1149.14,-1091.57 -1072.01,-1168.71 v2(-1071.51,-1168.71) ; U2.1 -995.68,-1474.18 -1002.49,-1480.99 -1002.49,-1535.52 -1002.24,-1535.26 -980.26,-1535.26 v2(-980,-1535) -979.74,-1535.26 -952.75,-1535.26 R5.1@-952.49,-1535.52
  Bottom Layer w10: v2(-1071.51,-1168.71) -1069.89,-1168.71 -1066.89,-1171.71 -1065.5,-1171.71 -1024.03,-1213.18 -1023.32,-1213.18 -980,-1256.5 v2(-980,-1535)
NetC1_1: C1.1 U1.14 | length 66
  Top Layer w8: C1.1 -738.9,-1290.06 -724.59,-1275.75 U1.14
NetC3_1: C3.1 U1.16 | length 83.1
  Top Layer w8: C3.1@-704.17,-1378.18 -698.03,-1378.18 -652.09,-1332.24 U1.16
NetC7_1: C7.1 R3.1 R6.2 | length 111
  Top Layer w8: R3.1 -546.61,-1433.71 -563.82,-1450.92 -563.82,-1468.24 R6.2 -525.33,-1471.03 C7.1
NetC10_1: C10.1 U2.2 | length 78.3
  Top Layer w10: U2.2 -976.53,-1425.99 -903.3,-1425.99 C10.1
NetC11_1: C11.1 R7.2 | length 50
  Top Layer w10: R7.2 C11.1
NetC12_1: C12.1 CN2.2 R6.1 | length 195.9
  Top Layer w8: C12.1 C12.1@-602.05,-1421.03 ; CN2.2@-556.46,-1591.57 CN2.2@-556.46,-1571.89
  Top Layer w10: C12.1@-602.05,-1421.03 R6.1 -602.05,-1526.3 CN2.2@-556.46,-1571.89
NetC12_2: C12.2 U1.18 | length 66.6
  Top Layer w8: U1.18 -620.6,-1348.66 -606.61,-1362.65 C12.2
NetC13_1: C13.1 R8.2 | length 54.4
  Top Layer w10: R8.2@-910.91,-1258.97 R8.2@-908.94,-1257 ; R8.2 C13.1
NetC14_1: C14.1 CN2.1 R10.1 | length 194
  Top Layer w8: C14.1@-648.9,-1418.75 C14.1 ; CN2.1@-605.67,-1591.57 CN2.1@-605.67,-1571.89
  Top Layer w10: C14.1@-648.9,-1418.75 R10.1 -648.9,-1528.66 CN2.1@-605.67,-1571.89
NetC14_2: C14.2 U1.17 | length 65.1
  Top Layer w8: C14.2 -646.61,-1360.26 -636.34,-1349.98 U1.17
NetC17_2: C17.2 U1.13 | length 61.6
  Top Layer w8: C17.2 -732.79,-1260 U1.13
NetC18_2: C18.2 U1.12 | length 71.6
  Top Layer w8: C18.2 -724.39,-1213.18 -693.39,-1244.19 -680.89,-1244.19 U1.12
NetC21_2: C21.2 DOT3.1 M1.3 R14.2 | length 241.7
  Top Layer w10: R14.2 -1498.18,-418.18 C21.2@-1441.94,-418.18 ; C21.2 -1439.98,-415.61 -1434.15,-409.78 -1434.15,-407.81 -1417.59,-391.25 -1390,-391.25 M1.3
NetCN1_1: CN1.1 U2.8 | length 181.8
  Top Layer w12: U2.8 -1198.94,-1472.34 -1154.37,-1472.34 -1130,-1496.71 -1130,-1535 -1136.83,-1541.83 -1136.83,-1583.01 CN1.1
NetCN1_2: CN1.2 R9.2 U2.5 | length 406
  Top Layer w12: U2.5 -1182.81,-1324.18 -1174.76,-1324.18 -1146.36,-1324.18 -1113,-1357.54 -1113,-1536.16 -1101.23,-1547.92 -1101.23,-1579.82 CN1.2@-1094.27,-1586.78 ; U2.5@-1180.57,-1324.18 -1174.76,-1318.37 -1174.76,-1301.5 -1152.44,-1279.18 -1150.47,-1279.18 -1145.64,-1274.35 R9.2
NetDOT1_1: DOT1.1 M1.37 | length 353.1
  Top Layer w8: v1(-690,-645) -690,-641.06 -676.83,-627.89 -676.83,-485.54 -632.52,-441.22 M1.37
  Bottom Layer w8: DOT1.1@-742.5,-697.5 DOT1.1 v1(-690,-645)
NetDOT2_1: DOT2.1 M1.36 | length 254.2
  Top Layer w8: v1(-652.01,-635.62) -655,-632.63 -655,-509.68 -636.54,-491.22 M1.36
  Bottom Layer w8: DOT2.1@-655,-680 -653.5,-678.5 -653.5,-637.11 v1(-652.01,-635.62)
NetDOT5_1: DOT5.1 R19.1 | length 372.1
  Top Layer w15: v2(-1700,-565) -1651.94,-565 -1597.05,-510.11 R19.1@-1564.39,-510.11
  Bottom Layer w15: DOT5.1@-1869.89,-458.99 -1856.01,-458.99 -1750,-565 v2(-1700,-565)
NetDOT6_1: DOT6.1 R20.1 | length 905.4
  Top Layer w15: v2(-1591.49,-611.59) -1591.3,-611.78 -1568.02,-611.78 R20.1@-1567.72,-611.48
  Bottom Layer w15: v2@-1590,-615 -1587.64,-617.36 -1527.64,-617.36 -1489.36,-655.64 -988.41,-655.64 -828.32,-495.55 DOT6.1
NetDOT7_1: DOT7.1 R21.1 | length 1437.7
  Top Layer w15: R21.1 -1566.28,-665.43 -1566.28,-688.45 -1565,-689.73 v2(-1565,-690)
  Bottom Layer w15: v2(-1565,-690) -1015.53,-690 -949.45,-756.07 -594.74,-756.07 -314.96,-476.3 DOT7.1
NetDOT8_1: DOT8.1 R22.1 | length 344.3
  Top Layer w15: v2(-1590,-565) -1589.81,-564.81 -1571.04,-564.81 -1567.72,-561.48 R22.1
  Bottom Layer w15: v2(-1590,-565) -1529.34,-565 -1509.34,-585 -1448.94,-585 -1341.68,-477.74 DOT8.1
NetJ1_A5: J1.A5 R17.2 | length 100.8
  Top Layer w10: J1.A5 -1802.76,-910.79 -1781.97,-890 R17.2
NetJ1_B5: J1.B5 R18.2 | length 96.8
  Top Layer w10: J1.B5 -1801.1,-1028.9 -1795.83,-1034.17 -1785.83,-1034.17 R18.2
NetM1_13: M1.13 R15.1 | length 270.3
  Top Layer w10: R15.1 -1271.52,-890 M1.13
NetM1_14: M1.14 R16.1 | length 264.8
  Top Layer w10: R16.1 -1271.52,-940 M1.14
NetR7_1: R7.1 U2.3 | length 297.8
  Top Layer w10: U2.3 -1025.89,-1374.18 -1052.07,-1348 -1052.07,-1270.42 -992.07,-1210.43 -944.12,-1210.43 R7.1
NetR8_1: R8.1 R9.1 U2.4 | length 272.7
  Top Layer w10: R9.1 -1086.17,-1272.38 v2(-1083.94,-1274.62) ; v2(-1023.88,-1277.37) -1022.73,-1276.23 -1022.73,-1271.35 -999.97,-1248.58 -946.66,-1248.58 R8.1 ; v2@-1023.88,-1275.75 -1023.88,-1311.51 -1018.02,-1317.37 -985.15,-1317.37 U2.4
  Bottom Layer w10: v2(-1083.94,-1274.62) -1028.26,-1274.62 -1025.5,-1277.37 v2(-1023.88,-1277.37)
NetR13_1: R13.1 U1.20 | length 57.4
  Top Layer w8: U1.20@-589.04,-1327.06 -580.98,-1335.12 -538.13,-1335.12 R13.1@-535.91,-1332.9
PA_VCC: C5.2 C15.1 C16.1 R2.2 U2.6 | length 313.1
  Top Layer w15: C15.1@-1270.01,-1374.18 U2.6
  Top Layer w25: R2.2@-1359.96,-1338.68 C5.2 C16.1@-1312.77,-1374.96 ; -1340,-1374 -1272.49,-1374 -1181,-1374 U2.6@-1180,-1375
PGND: C10.2 C15.2 C16.2 R5.2 U2.7 | length 197.1
  Top Layer w15: C16.2 C15.2 -1270.53,-1410.12 -1267.2,-1413.45 -1267.2,-1415.39 -1258.41,-1424.18 U2.7 ; R5.2 -917.28,-1477.05 -903.46,-1463.23 C10.2
  other v1: -1230,-1615 -945,-1595 -1220,-1530 -1295,-1505 -1065,-1445
USB_N: C22.1 J1.A7 J1.B7 R15.2 | length 438.8
  Top Layer w8: J1.A7 -1913.21,-969.84 -1917.89,-965.15 -1917.89,-935.16 -1913.21,-930.47 J1.B7 -1679.67,-930.47 -1640.11,-890.91 -1620.91,-890.91 C22.1 R15.2
USB_P: C23.1 J1.A6 J1.B6 R16.2 | length 385.2
  Top Layer w8: J1.B6 -1834.69,-989.53 -1830,-984.84 -1830,-950.16 ; J1.A6 -1830,-950.16 ; R16.2 -1572.28,-942.28 C23.1 -1625.83,-949.11 -1631.43,-949.11 -1632.48,-950.16 -1830,-950.16
VBUS: CN4.1 D1.1 J1.A4 J1.A9 J1.B4 J1.B9 | length 846.2
  Top Layer w20: CN4.1@-1995.68,-1345.25 CN4.1@-1970.25,-1345.25 ; -1931.65,-880.59 -1926.65,-875.59 -1909.81,-875.59 -1897.92,-863.7 J1.A4@-1887.79,-863.7 ; -1926.1,-1039.41 -1921.1,-1044.41 -1909.81,-1044.41 -1897.92,-1056.3 J1.A9@-1887.79,-1056.3
  Top Layer w30: CN4.1 -1962.57,-1340.4 -1945,-1322.82 -1945,-1210 -1945,-1199.01 -1969.69,-1174.32 -1969.69,-995.52 ; -1954.01,-1190 D1.1@-1802.73,-1190 ; -1931.65,-880.59 -1931.77,-880.59 -1969.69,-918.51 -1969.69,-995.52 ; -1926.1,-1039.41 -1926.1,-1039.11 -1969.69,-995.52
VCC: C24.1 C25.1 D1.2 R2.1 U4.3 | length 461.9
  Top Layer w20: U4.3@-1582.01,-1294.46 -1371.73,-1294.46 -1365.33,-1300.85 R2.1@-1360,-1300.85
  Top Layer w25: D1.2 -1688.86,-1186.17 -1681.68,-1178.99 -1672.48,-1178.99 -1667.03,-1173.54 -1639.4,-1173.54 -1628.97,-1183.97 -1618.26,-1183.97 -1583.42,-1218.81 C25.1@-1580.79,-1218.81 ; U4.3 -1589.2,-1294.46 -1582.01,-1287.27 -1582.01,-1236.62 -1576.67,-1231.27 -1577.37,-1230.58 C25.1
VDD33: C19.1 C20.1 C26.1 C27.1 CN3.1 CN5.1 CN6.2 M1.2 R1.1 R4.1 R14.1 U4.2 U4.4 U5.1 | length 5449.9
  Top Layer w10: v2(-1040,-1565) -1040,-1563.38 -1037.72,-1561.09 R4.1
  Top Layer w15: v1@-380,-1131 -380,-1170 -240.45,-1309.55 CN5.1
  Top Layer w25: U5.1@-1974.53,-382 -1689.42,-382 ; U4.4@-1868.12,-1385.01 U4.4 ; U4.4@-1805,-1420 -1763.43,-1461.57 CN6.2 ; v1@-1666.79,-359.37 -1630,-359.37 -1570,-359.37 R14.1 -1494.19,-353.56 -1483.56,-353.56 -1471.34,-341.34 M1.2@-1270.35,-341.34 ; U4.2@-1631.9,-1385.01 -1627.82,-1389.09 C27.1 C26.1 C26.1@-1460,-1387.91 ; v1(-283.13,-939.42) -283.13,-938.27 v1(-267.1,-922.24) -265.44,-920.58 -265.44,-711.21 -244.06,-689.84 CN3.1 CN3.1@-184.92,-689.84
  Top Layer w30: v1(-1675,-395) v1(-1675,-365) ; C26.1@-1460,-1387.91 v1(-1460,-1355) v1(-1460,-1330) ; R1.1 -401.28,-1130 v1(-380,-1130) v1(-380,-1107.38)
  Top Layer w50: U4.4 U4.2@-1631.9,-1385.01
  Bottom Layer w10: v1(-1460,-1355) -1460,-1455.46 -1350.46,-1565 v2(-1040,-1565)
  Bottom Layer w25: v1(-380,-1130) v1(-380,-1107.38)
  Bottom Layer w30: -1825,-1410 -1825,-1170 -1640,-985 -1640,-430 v1(-1675,-395) v1(-1675,-365) ; v1(-1460,-1355) v1(-1460,-1330) -1460,-1135.15 -1247.99,-923.14 -439.45,-923.14 -362.76,-999.84 ; v1(-380,-1107.38) -380,-1035.14 -353.73,-1008.87 -352.57,-1008.87 v1(-283.13,-939.42) -283.13,-938.27 v1(-267.1,-922.24)
  other v1: -1825,-1395 -1825,-1360
pads on no net: Designator38.1 J1. J1.A8 J1.B8 M1.24 M1.25 M1.28 M1.29 M1.30

## Polygon pours and split planes (outlines as drawn)
GND on Top Layer "NONET_L-01_P-001" (solid, pour order 12): -2170,-1780 -2170,0 -1378.36,0 -1377.28,-230 -472.03,-230 -473.07,0 0,0 0,-1780
AGND on Top Layer "NONET_L-01_P-001" (solid, pour order 9): -755,-1110 -800.71,-1145.71 ccw(c-730,-1216.42) -830,-1216.42 -830,-1580 ccw(c-790,-1580) -790,-1620 -335,-1620 ccw(c-335,-1600) -315,-1600 -315,-1335 -410,-1240 -410,-1180 -450.71,-1139.29 ccw(c-521.42,-1209.99) -521.42,-1110
PGND on Top Layer "NONET_L-01_P-001" (solid, pour order 10): -1330,-1394.16 -1305.84,-1370 -950,-1370 -920.85,-1370 -885,-1399.67 -885,-1595 -925,-1635 -1265,-1635 -1330,-1570
GND on Bottom Layer "NONET_L-01_P-001" (solid, pour order 8): -2170,-1780 -2170,0 -1378.36,0 -1377.28,-230 -472.03,-230 -473.07,0 0,0 0,-1780
PGND on Bottom Layer "NONET_L-01_P-001" (solid, pour order 6): -1330,-1394.16 -1305.84,-1370 -950,-1370 -920.85,-1370 -885,-1399.67 -885,-1595 -925,-1635 -1265,-1635 -1330,-1570
AGND on Bottom Layer "NONET_L-01_P-001" (solid, pour order 4): -755,-1110 -800.71,-1145.71 ccw(c-730,-1216.42) -830,-1216.42 -830,-1580 ccw(c-790,-1580) -790,-1620 -335,-1620 ccw(c-335,-1600) -315,-1600 -315,-1335 -410,-1240 -410,-1180 -450.71,-1139.29 ccw(c-521.42,-1210) -521.42,-1110

## Other copper
Top Layer:
  rectangle: -330,-1505 -275,-1490
  region: -888.18,-1621.82 -907.5,-1602.5 -917.5,-1612.5 -898.18,-1631.82
Bottom Layer:
  rectangle: -330,-1505 -275,-1490
  region: -888.18,-1621.82 -907.5,-1602.5 -917.5,-1612.5 -898.18,-1631.82

## Silkscreen, mask and mechanical layers (free items; w line width, h text height)
Top Overlay:
  text "Date:250322 / Ver: 1.0" at -1850,-205 h30
  text "I2C" at -1954,-221 h35 r270
  text "SPI1" at -231,-359 h35 r90
  text "3V3" at -1920,-395 h25
  text "IO17" at -1920,-440 h25
  text "EN" at -1392,-447 h10
  text "GND" at -320,-455 h25
  text "IO18" at -1920,-490 h25
  text "IO1" at -320,-505 h25
  text "GND" at -1920,-545 h25
  text "IO2" at -320,-555 h25
  text "IO42" at -320,-600 h25
  text "IO41" at -320,-650 h25
  text "3V3" at -320,-700 h25
  text "SPI2" at -231,-994 h35 r90
  text "GND" at -335,-1075 h25
  text "IO40" at -335,-1130 h25
  text "IO39" at -335,-1175 h25
  text "IO38" at -335,-1220 h25
  text "+" at -1979.17,-1255 h25 r270
  text "IO0" at -330,-1270 h25
  text "5v_IN" at -1925.83,-1300 h25 r270
  text "3V3" at -330,-1320 h25
  text "-" at -1977.5,-1430 h25 r270
  text "15" at -1707.5,-1532 h15 r90
  text "16" at -1657.5,-1532 h15 r90
  text "GND" at -1807.5,-1542 h15 r90
  text "3V3" at -1757.5,-1542 h15 r90
  text "IO8" at -1607.5,-1542 h15 r90
  text "IO3" at -1557.5,-1542 h15 r90
  text "IO9" at -1512.5,-1542 h15 r90
  text "SPI3" at -1464,-1554 h35
  text "+" at -695,-1579.17 h25
  text "-" at -510,-1582.5 h25
  text "+" at -1045,-1584.17 h25
  text "-" at -1230,-1587.5 h25
  text "SPK" at -1310,-1750 h25 r90
  text "MIC" at -770,-1750 h25 r90
Bottom Overlay:
  text "TP4/IO4" at -1859.14,-675 h50 r45
  text "TP3/IO5" at -1429.14,-675 h50 r45
  text "TP2/IO6" at -919.14,-675 h50 r45
  text "TP1/io7" at -359.14,-675 h50 r45
  text "RXD" at -648,-732 h10
  text "TXD" at -733,-737 h10
  text "GND" at -840,-860 h10
  text "IO0" at -758,-862 h10
  text "TWO EYE AI TALK DEMO BOARD" at -335,-1275 h60
Mechanical 1:
  circle w5: c-2051.89,-118.11 r59.06
  circle w5: c-118.11,-118.11 r59.06
  circle w5: c-118.11,-1661.89 r59.06
  circle w5: c-2051.89,-1661.89 r59.06
  lines w5: -2170,-1780 -2170,0 -1378.36,0 -1377.28,-230 -472.03,-230 -473.07,0 0,0 0,-1780 -2170,-1780

## Text inside footprints (layer, text, board x,y; h text height)
M1: Top Overlay "Antenna Area" at -1147.91,-140.83 h78.74; Top Overlay "26}" at -673.54,-935.46 h35.43; Top Overlay "40}" at -673.51,-285.06 h35.43; Top Overlay "15}" at -1218.94,-935.46 h35.43; Top Overlay "1}" at -1218.94,-285.06 h35.43